# Altium PCB power.PcbDoc
Units mil, origin at the board's own origin, x right, y up, seen from the top; angles counter-clockwise.
Board outline 6000 x 4000 mil, 2 copper layers (Top Layer, Bottom Layer); 8 components, 45 nets, 33 pads, 0 vias.
Unrouted connection lines stored in the file: 28.
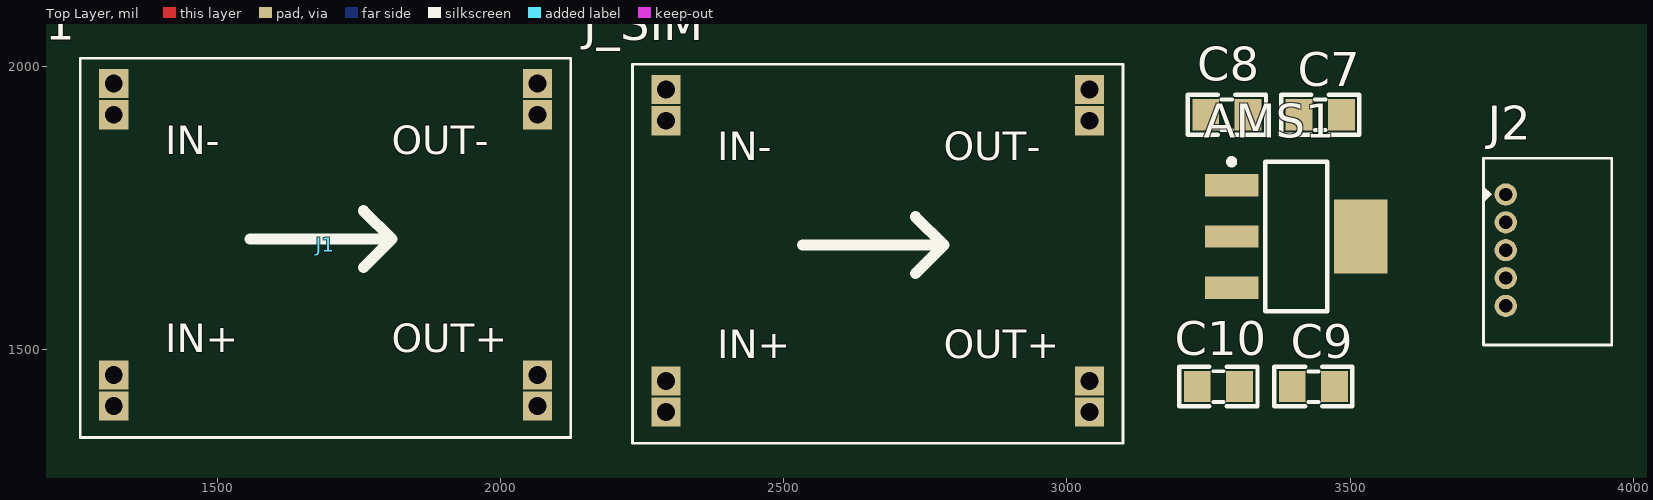
[diagram p0: Top Layer view]
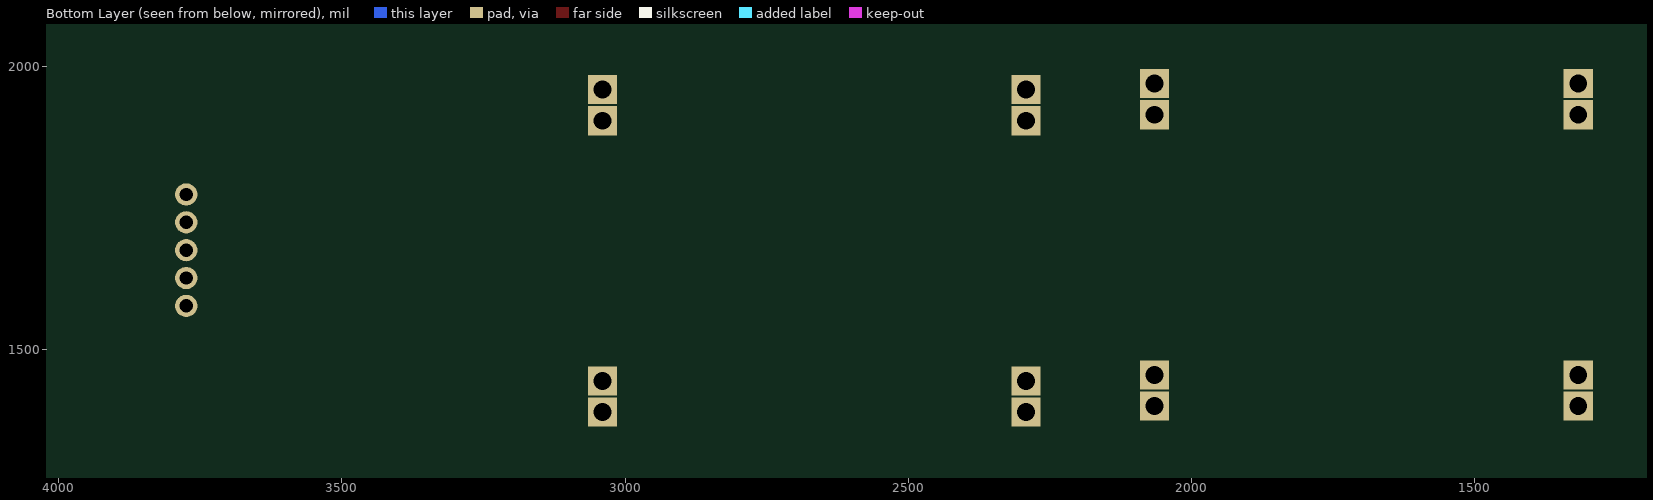
[diagram p1: Bottom Layer view, seen from below]

## Layer stack, top to bottom
Top Solder: solder mask 0.4, Solder Resist, Dk 3.5
Top Layer: signal copper 1.4
Dielectric 1: dielectric 12.6, FR-4, Dk 4.8
Bottom Layer: signal copper 1.4
Bottom Solder: solder mask 0.4, Solder Resist, Dk 3.5

## Board outline
1000,1000 7000,1000 7000,5000 1000,5000

## Design rules (kind name [scope] priority, off if disabled: settings)
Clearance [All] p1: gap=10 ignorepadtopadclearanceinfootprint=FALSE except(0: Arc-Hole Track-Hole SMDPad-Hole THPad-Hole Via-Hole Fill-Hole Poly-Hole Region-Hole Text-Hole)
PolygonConnect [All] p1: connectstyle=Relief reliefconductorwidth=10 reliefentries=4 polygonreliefangle="90 Angle" airgapwidth=10
RoutingVias [All] p1: holewidth=28 width=50 viastyle="Through Hole" minholewidth=28 minwidth=50 maxholewidth=28 maxwidth=50
SolderMaskExpansion [All] p1: expansion=4 istentingtop=FALSE
Width [All] p1: maxlimit=10 minlimit=10 preferedwidth=10
30 further rules are at their usual default settings.

## Classes and differential pairs
component class RTC: U2

## Components (designator, comment, footprint, x,y, rotation, side; value= is the part's Value field where it differs from the comment)
AMS1 "AMS1117-3.3V" SOT223 3405,1700 r270 top value="AMS1117-3.3V SOT223"
C7 "106" "tu 0805" 3447.57,1914.87 r180 top
C8 "104" "tu 0805" 3282.57,1914.87 r180 top
C9 "106" "tu 0805" 3435,1435 r0 top
C10 "104" "tu 0805" 3267.57,1434.87 r180 top
J1 "MP1584" DC-BRICK 1257.91,1345.32 r0 top
J2 "653005117322" CON5_50_653005117322_TH_RA 3775,1774.21 r270 top
J_SIM "MP1584" DC-BRICK 2232.91,1334.76 r0 top

## Footprints (in the part's own frame and the unit in brackets; to place one, negate y for a bottom-side part, rotate by r counter-clockwise, add the part's x,y. Pads: shape width x height; smd on the part's side, far side on the other; paste and mask are expansions set on the pad)
CON5_50_653005117322_TH_RA [mm] "Connector Header"
  round 1 hole 0.6: 1(0,0) 2(1.25,0) 3(2.5,0) 4(3.75,0) 5(5,0)
  silkscreen extent -1.63,-1.02 6.76,4.75, body extent -1.5,-0.47 6.57,4.92, height 3.51
DC-BRICK [mm]
  rect 1.308x1.308 / inner round 1.308 / far side rect 1.308x1.308 hole 0.8: IN1+(1.5,1.4) IN1-(1.5,14.47) IN2+(1.5,2.8) IN2-(1.5,15.87) OUT1+(20.5,1.4) OUT1-(20.5,14.47) OUT2+(20.5,2.8) OUT2-(20.5,15.87)
  silkscreen extent 0,0 22,17, body extent -2.45,-3 2.45,3, height 1.7
SOT223 [mm]
  rect 1x2.4 smd: 1(-2.3,-2.9) 2(0,-2.9) 3(2.3,-2.9)
  rect 3.3x2.4 smd: 4(0,2.9)
  silkscreen extent -3.47,-3.02 3.35,1.4, body extent -3.25,-3.56 3.25,3.4, height 1.68
"tu 0805" [mm] "Compoment SMD 80x50mil"
  rect 1.2x1.4 smd: 1(-0.946,-0.003) 2(0.954,-0.003)
  silkscreen extent -1.75,-0.89 1.75,0.89, body extent -1.01,-0.64 1.01,0.63, height 0.61

## Part data
AMS1: library part "AMS1117 SMD", "Dán", Chung_Loai=Dán, Don_Vi=Con, Ma_Hang=MH000596
C7 C9: library part "Tu 0805 106 16V 10%", "Dán", Chung_Loai=Dán, Don_Vi=Con, Ma_Hang=MH004553, So_Chan=2, Ten_Linh_Kien="Tụ 0805 106-10uF 10% 16V"
C8 C10: library part "Tu 0805 104 50V 10%", "Dán", Chung_Loai=Dán, Don_Vi=Con, Ma_Hang=MH004551, So_Chan=2, Ten_Linh_Kien="Tụ 0805 104-100nF 10% 50V"
J1 J_SIM: "Buck Switching Regulator IC Positive Adjustable 0.8V 1 Output 3A 8-SOIC (0.154, 3.90mm Width) Exposed Pad", Package="SOIC-8 Monolithic Power", Check_prices=https://www.snapeda.com/parts/MP1584/Monolithic+Power+Systems+Inc./view-part/?ref=eda, MF="Monolithic Power", MP=MP1584, SnapEDA_Link=https://www.snapeda.com/parts/MP1584/Monolithic+Power+Systems+Inc./view-part/?ref=snap
J2: library part CON-PLG_5X1-50-RA-TH, "5 Pins, 1 Row 1.25mm Pitch, right angle Connector, male", Alternate Part Number-1=NA, Case/Package=TH-CON, Crimp Part Number=653153128130, Manufacturer=JST, Mating Part Number=653005113322, Manufacturer Part Number=653005117322, Supplier Part Number-1=653005117322, Supplier-1=WURTH

## Nets (pads, with @x,y where several pads share a name; then routed paths per layer and width w, separated by ;. In a path a pad name is that pad's centre, name@x,y a point inside that pad or via, vN(x,y) a via of type N, cw(c..) or ccw(c..) an arc to the next point about the centre after c; other vN are vias at no path point)
BAT_11V6: J1.IN1+ J1.IN2+ J2.1 J_SIM.IN1+ J_SIM.IN2+
CHIP_EN: 
DN: 
DP: 
DTR: 
GND: AMS1.1 C7.2 C8.2 C9.2 C10.2 J1.IN1- J1.IN2- J1.OUT1- J1.OUT2- J2.5 J_SIM.IN1- J_SIM.IN2- J_SIM.OUT1- J_SIM.OUT2-
GPIO0: 
GPIO1: 
GPIO2: 
GPIO3: 
GPIO4: 
GPIO5: 
GPIO6: 
GPIO7: 
GPIO8: 
GPIO9: 
GPIO10: 
GPIO18: 
GPIO19: 
Net485_2: 
Net485_3: 
NetBT1_1: 
NetBT_1-: 
NetBT_2+: 
NetC11_1: 
NetD1_1: 
NetD2_1: 
NetL1_1: 
NetQ1_1: 
NetQ2_1: 
NetR4_2: 
NetR4_3: 
NetR4_4: 
NetR6_1: 
NetR6_2: 
RTS: 
RXD: 
TXD: 
U0RXD: 
U0TXD: 
V_SIM_7V: J2.2 J_SIM.OUT1+ J_SIM.OUT2+
VBUS: 
VCC_3V3MCU: 
VCC_3V3PW: AMS1.2 AMS1.4 C7.1 C8.1 J2.4
VCC_5VPW: AMS1.3 C9.1 C10.1 J1.OUT1+ J1.OUT2+ J2.3

## Text inside footprints (layer, text, board x,y; h text height)
J1: Top Overlay "IN+" at 1407.91,1495.32 h50; Top Overlay "IN-" at 1407.91,1845.32 h50; Top Overlay "OUT+" at 1807.91,1495.32 h50; Top Overlay "OUT-" at 1807.91,1845.32 h50
J_SIM: Top Overlay "IN+" at 2382.91,1484.76 h50; Top Overlay "IN-" at 2382.91,1834.76 h50; Top Overlay "OUT+" at 2782.91,1484.76 h50; Top Overlay "OUT-" at 2782.91,1834.76 h50